# EAGLE board EMSBoard (EAGLE 9.6.2)
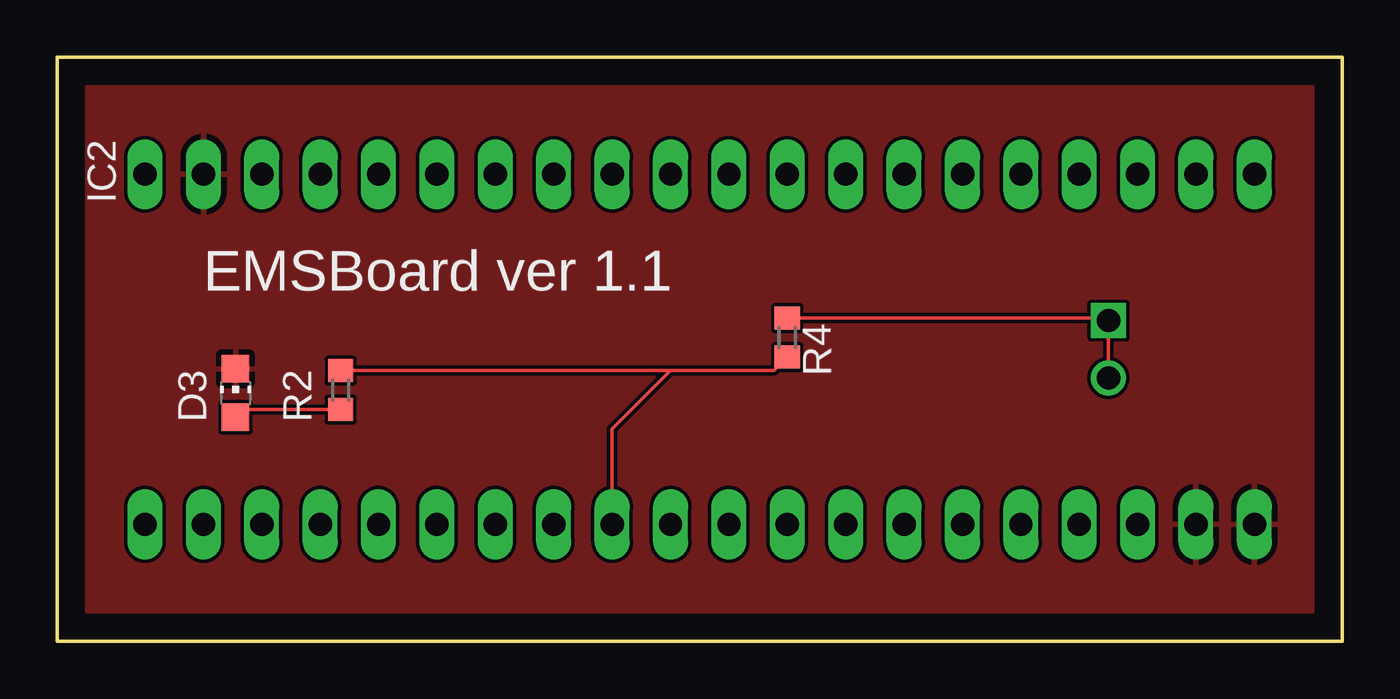
[diagram p0: board, top side]
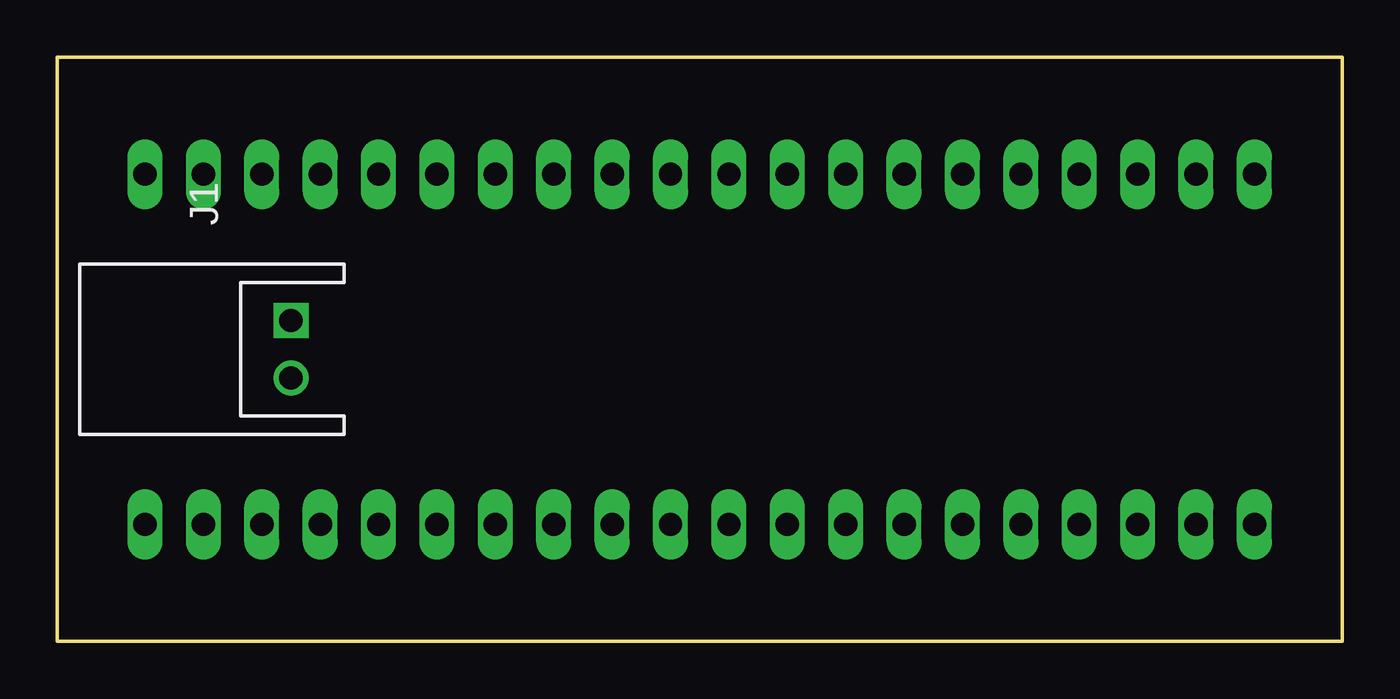
[diagram p1: board, bottom side, seen from below]

Size 55.88 x 25.4 mm. Coordinates in mm from the lower left corner, seen from the top.
Outline: 0,25.4 0,0 55.88,0 55.88,25.4 0,25.4
Copper layers (1*16): Top 0.035mm / dielectric 1.5mm / Bottom 0.035mm
Design rules "default": minimum track width 6mil, minimum drill 0.35mm, track to track 6mil, track to pad 6mil, pad to pad 6mil, via to via 6mil, smd to smd 6mil, copper to edge 40mil, drill to drill 6mil, minimum pad ring 10mil, minimum via ring 8mil, stop-mask expansion 4mil, vias tented up to drill 0mil, thermal gap 10mil

## Footprints (pad centres in the part's own frame; a part is rotated, then mirrored left to right if it is on the bottom)
CHIP-LED0805 = smd 1.2 x 1.2: A 0,-1.05; C 0,1.05
BLUE_PILL = drill 1.016 long: P$1 -7.62,10.16; P$2 -7.62,7.62; P$3 -7.62,5.08; P$4 -7.62,2.54; P$5 -7.62,0; P$6 -7.62,-2.54; P$7 -7.62,-5.08; P$8 -7.62,-7.62; P$9 -7.62,-10.16; P$10 -7.62,-12.7; P$11 -7.62,-15.24; P$12 -7.62,-17.78; P$13 -7.62,-20.32; P$14 -7.62,-22.86; P$15 -7.62,-25.4; P$16 -7.62,-27.94; P$17 -7.62,-30.48; P$18 -7.62,-33.02; P$19 -7.62,-35.56; P$20 -7.62,-38.1; P$21 7.62,-38.1; P$22 7.62,-35.56; P$23 7.62,-33.02; P$24 7.62,-30.48; P$25 7.62,-27.94; P$26 7.62,-25.4; P$27 7.62,-22.86; P$28 7.62,-20.32; P$29 7.62,-17.78; P$30 7.62,-15.24; P$31 7.62,-12.7; P$32 7.62,-10.16; P$33 7.62,-7.62; P$34 7.62,-5.08; P$35 7.62,-2.54; P$36 7.62,0; P$37 7.62,2.54; P$38 7.62,5.08; P$39 7.62,7.62; P$40 7.62,10.16
S2B-XH-A = drill 1.016 square: 1 1.25,0 | drill 1.016: 2 -1.25,0
R0603 = smd 1 x 1.1: 1 -0.85,0; 2 0.85,0

## Placement (x,y rotation side)
D3  [CHIP-LED0805]  7.75,10.79 0 top
IC2  BLUE_PILL  [BLUE_PILL]  13.97,12.7 90 top
J1  [S2B-XH-A]  45.72,12.7 90 bottom
R2  1k  [R0603]  12.32,10.92 90 top
R4  100  [R0603]  31.75,13.21 270 top

## Library data of the parts
D3 = led
IC2 = stm32_mcu
J1 = jst-xh
R2 R4 = rcl; SPICEPREFIX: R

## Nets
GND: D3.C IC2.P$19 IC2.P$20 IC2.P$39
N$1: D3.A R2.1
N$2: J1.1 J1.2 R4.1
N$3: IC2.P$9 R2.2 R4.2

## Tracks (layer width: path | path; a pad name or v marks a point on that pad's centre or on a via)
GND
  pour Top: 1.27,24.13 54.61,24.13 54.61,1.27 1.27,1.27
N$1
  Top 0.152: R2.1 8.07,10.07 D3.A
N$2
  Top 0.152: J1.2 J1.1 45.61,14.06 R4.1
N$3
  Top 0.152: R2.2 26.67,11.77 | 26.67,11.77 31.16,11.77 R4.2 32.09,12.36 | IC2.P$9 24.13,9.23 26.67,11.77

## Text on the board
tPlace: EMSBoard ver 1.1